# Altium PCB DSP6748_F.PcbDoc (part 13 of 16)
Units mil, origin at the board's own origin, x right, y up, seen from the top; angles counter-clockwise.
Board outline 8188.98 x 4055.12 mil, 4 copper layers (Top Layer, GND, VCC, Bottom Layer); 409 components, 262 nets, 1424 pads, 350 vias.
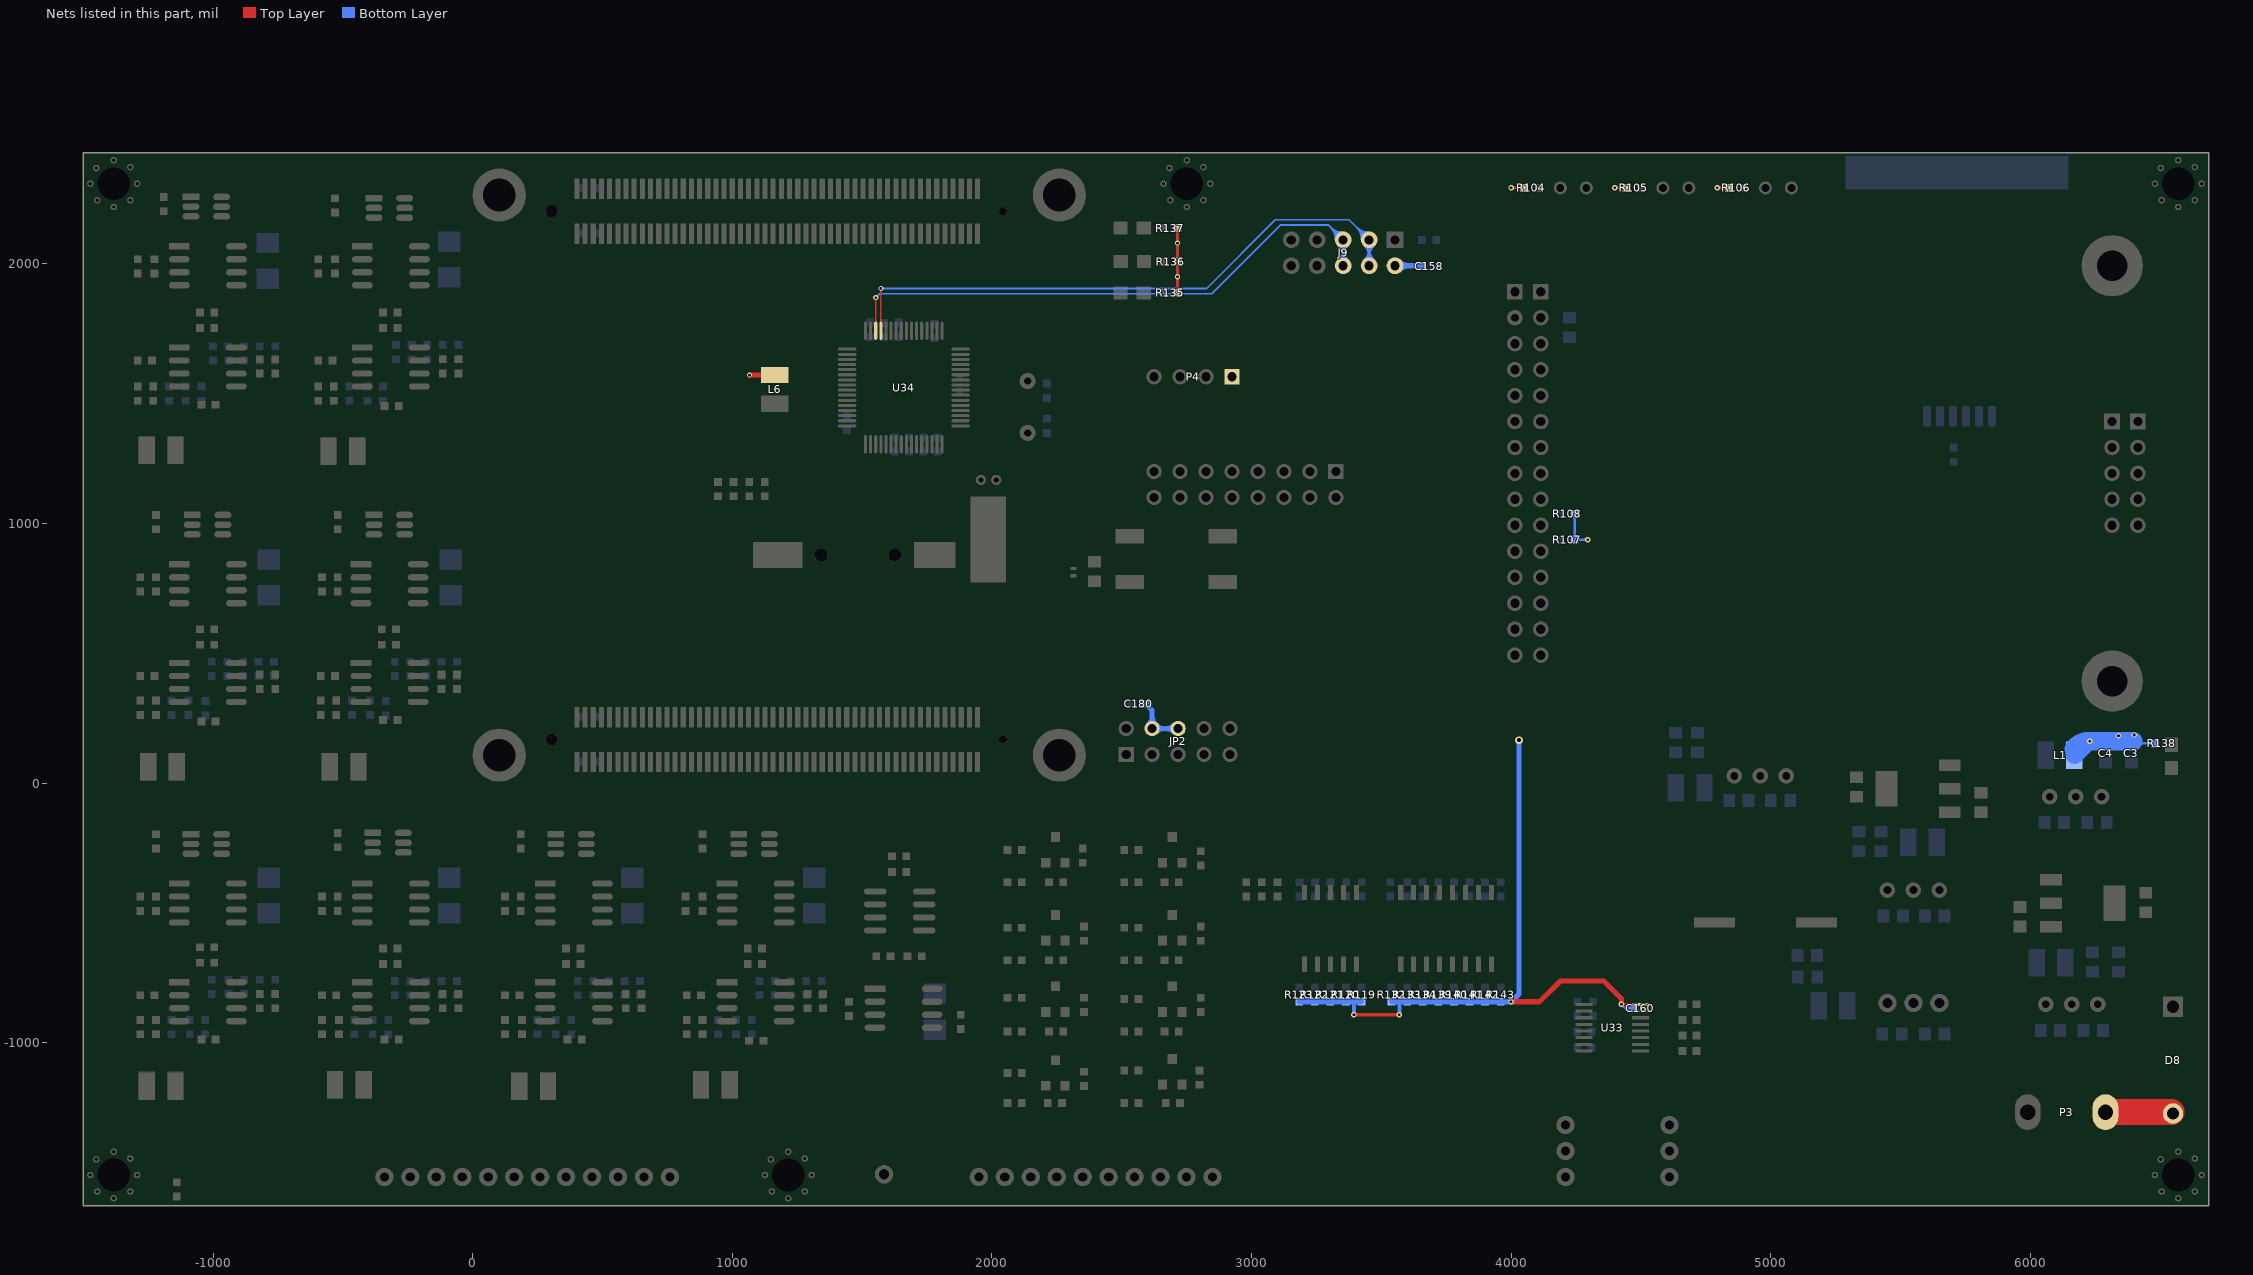
[diagram p15: the nets of this part, all layers, seen from the top]

## Via types
v1: diameter 21, hole 10, Top Layer to Bottom Layer, 244 vias
v2: diameter 20, hole 10, Top Layer to Bottom Layer, 84 vias
v3: diameter 32, hole 16, Top Layer to Bottom Layer, 11 vias
v4: diameter 24, hole 12, Top Layer to Bottom Layer, 7 vias
v5: diameter 39.37, hole 19.68, Top Layer to Bottom Layer, 3 vias
v6: diameter 30, hole 15, Top Layer to Bottom Layer, 1 vias

## Nets (pads, with @x,y where several pads share a name; then routed paths per layer and width w, separated by ;. In a path a pad name is that pad's centre, name@x,y a point inside that pad or via, vN(x,y) a via of type N, cw(c..) or ccw(c..) an arc to the next point about the centre after c; other vN are vias at no path point) (continued)
UART3_RX: J9.5 J9.6 U34.30 | length 3004.8
  Top Layer w7: v2(1552.29,1870) 1552.54,1869.75 U34.30@1552.54,1742.02
  Bottom Layer w7: v2(1552.29,1870) 1567.29,1885 2847.29,1885 3112.29,2150 3295.67,2150 J9.5@3353.15,2092.52 J9.6@3353.15,1992.52 ; v2@1552.29,1876.5 ccw(c1552.29,1892.19) 1563.39,1881.1 ccw(c1574.48,1870) v2@1558.79,1870 ; J9.5@3324.15,2092.52 ccw(c3254.14,2092.52) 3303.64,2142.03 ccw(c3353.15,2191.53) J9.5@3353.15,2121.52 ; J9.5@3331.15,2092.52 ccw(c3278.04,2092.52) 3315.59,2130.08 ccw(c3353.15,2167.63) J9.5@3353.15,2114.52 ; J9.6@3332.64,2013.03 ccw(c3283.14,2062.53) 3353.15,2062.53 ccw(c3423.16,2062.53) J9.6@3373.66,2013.03 ; J9.5@3332.64,2072.01 cw(c3283.14,2022.51) 3353.15,2022.51 cw(c3423.16,2022.51) J9.5@3373.66,2072.01 ; J9.6@3337.59,2008.08 ccw(c3300.04,2045.63) 3353.15,2045.63 ccw(c3406.26,2045.63) J9.6@3368.71,2008.08 ; J9.5@3337.59,2076.96 cw(c3300.04,2039.41) 3353.15,2039.41 cw(c3406.26,2039.41) J9.5@3368.71,2076.96 ; J9.5@3338.15,2092.52 ccw(c3301.94,2092.52) 3327.54,2118.13 ccw(c3353.15,2143.73) J9.5@3353.15,2107.52 ; J9.6@3342.54,2003.13 ccw(c3316.94,2028.73) 3353.15,2028.73 ccw(c3389.36,2028.73) J9.6@3363.76,2003.13 ; J9.5@3342.54,2081.91 cw(c3316.94,2056.31) 3353.15,2056.31 cw(c3389.36,2056.31) J9.5@3363.76,2081.91 ; J9.6@3344.65,2020.25 ccw(c3341.71,2029.85) 3351.61,2031.54 ccw(c3365.67,2033.93) J9.6@3361.54,2020.28 ; J9.6@3344.76,2020.28 ccw(c3340.63,2033.93) 3354.69,2031.54 ccw(c3364.59,2029.85) J9.6@3361.65,2020.25
UART3_TX: J9.3 J9.4 U34.29 | length 3122.4
  Top Layer w7: U34.29@1572.23,1742.02 1572.23,1845 ; v2(1572.29,1905) 1572.23,1904.94 1572.23,1845 ; 1572.65,1845.42 1572.23,1845
  Bottom Layer w7: v2(1572.29,1905) 2827.29,1905 3092.29,2170 3375.67,2170 J9.3@3453.15,2092.52 J9.4@3453.15,1992.52 ; v2@1576.89,1900.4 cw(c1587.98,1889.31) 1587.98,1905 cw(c1587.98,1920.69) v2@1576.89,1909.6 ; J9.3@3424.15,2092.52 ccw(c3354.14,2092.52) 3403.64,2142.03 ccw(c3453.15,2191.53) J9.3@3453.15,2121.52 ; J9.3@3431.15,2092.52 ccw(c3378.04,2092.52) 3415.59,2130.08 ccw(c3453.15,2167.63) J9.3@3453.15,2114.52 ; J9.4@3432.64,2013.03 ccw(c3383.14,2062.53) 3453.15,2062.53 ccw(c3523.16,2062.53) J9.4@3473.66,2013.03 ; J9.3@3432.64,2072.01 cw(c3383.14,2022.51) 3453.15,2022.51 cw(c3523.16,2022.51) J9.3@3473.66,2072.01 ; J9.4@3437.59,2008.08 ccw(c3400.04,2045.63) 3453.15,2045.63 ccw(c3506.26,2045.63) J9.4@3468.71,2008.08 ; J9.3@3437.59,2076.96 cw(c3400.04,2039.41) 3453.15,2039.41 cw(c3506.26,2039.41) J9.3@3468.71,2076.96 ; J9.3@3438.15,2092.52 ccw(c3401.94,2092.52) 3427.54,2118.13 ccw(c3453.15,2143.73) J9.3@3453.15,2107.52 ; J9.4@3442.54,2003.13 ccw(c3416.94,2028.73) 3453.15,2028.73 ccw(c3489.36,2028.73) J9.4@3463.76,2003.13 ; J9.3@3442.54,2081.91 cw(c3416.94,2056.31) 3453.15,2056.31 cw(c3489.36,2056.31) J9.3@3463.76,2081.91 ; J9.3@3444.65,2064.79 cw(c3441.71,2055.19) 3451.61,2053.5 cw(c3465.67,2051.11) J9.3@3461.54,2064.76 ; J9.3@3444.76,2064.76 cw(c3440.63,2051.11) 3454.69,2053.5 cw(c3464.59,2055.19) J9.3@3461.65,2064.79
VCC: D8.1 P3.2 | length 254.1
  Top Layer w100: P3.2@6289.81,-1267.48 D8.1@6543.9,-1267.48
VCC+3V3: C3.1 C4.1 C158.2 C160.2 C180.1 J9.2 JP2.4 JP2.6 L1.2 L6.1 P4.1 R104.1 R105.1 R106.1 R107.1 R108.1 R119.1 R120.1 R121.1 R122.1 R123.1 R132.1 R133.1 R134.1 R135.1 R136.1 R137.1 R138.1 R139.1 R140.1 R141.1 R142.1 R143.1 U33.16 | length 6376.5
  Top Layer w10: v2@2711.61,1946.46 cw(c2703.08,1937.93) 2715.15,1937.93 cw(c2727.22,1937.93) v2@2718.69,1946.46 ; v2@2711.61,1953.54 ccw(c2703.08,1962.07) 2715.15,1962.07 ccw(c2727.22,1962.07) v2@2718.69,1953.54 ; v2@2711.61,2076.46 cw(c2703.08,2067.93) 2715.15,2067.93 cw(c2727.22,2067.93) v2@2718.69,2076.46 ; v2@2711.61,2083.54 ccw(c2703.08,2092.07) 2715.15,2092.07 ccw(c2727.22,2092.07) v2@2718.69,2083.54 ; R135.1@2715.15,1887.52 R137.1@2715.15,2137.52 ; 2715.15,1981.96 cw(c2742.71,1981.96) R136.1@2723.22,2001.45 ; 2715.15,1986.79 ccw(c2694.42,1986.79) R136.1@2709.08,2001.45 ; 2715.15,2030.25 cw(c2694.42,2030.25) R136.1@2709.08,2015.59 ; 2715.15,2035.08 ccw(c2742.71,2035.08) R136.1@2723.22,2015.59 ; v1(3999.81,2292.52) R104.1@4049.81,2292.52 ; v1(4399.81,2292.52) R105.1@4444.81,2292.52 ; v1(4425.24,-852.91) U33.16@4499.06,-852.91 ; v1(4794.81,2292.52) R106.1@4839.81,2292.52 ; R135.1@2708.08,1895.59 ccw(c2691.01,1912.66) 2715.15,1912.66 ; R135.1@2708.08,1895.59 ccw(c2691.01,1912.66) 2715.15,1912.66 ; R135.1@2708.08,1895.59 ccw(c2691.01,1912.66) 2715.15,1912.66 ; R137.1@2708.08,2130.45 cw(c2691.01,2113.38) 2715.15,2113.38 ; R137.1@2708.08,2130.45 cw(c2691.01,2113.38) 2715.15,2113.38 ; R137.1@2708.08,2130.45 cw(c2691.01,2113.38) 2715.15,2113.38 ; R136.1@2709.08,2001.45 cw(c2692.01,1984.38) 2716.15,1984.38 ; R136.1@2709.08,2001.45 cw(c2692.01,1984.38) 2716.15,1984.38 ; R136.1@2709.08,2015.59 ccw(c2692.01,2032.66) 2716.15,2032.66 ; R136.1@2709.08,2015.59 ccw(c2692.01,2032.66) 2716.15,2032.66 ; 2715.15,1912.66 ccw(c2739.29,1912.66) R135.1@2722.22,1895.59 ; 2715.15,1912.66 ccw(c2739.29,1912.66) R135.1@2722.22,1895.59 ; 2715.15,1912.66 ccw(c2739.29,1912.66) R135.1@2722.22,1895.59 ; 2715.15,2113.38 cw(c2739.29,2113.38) R137.1@2722.22,2130.45 ; 2715.15,2113.38 cw(c2739.29,2113.38) R137.1@2722.22,2130.45 ; 2715.15,2113.38 cw(c2739.29,2113.38) R137.1@2722.22,2130.45 ; 2716.15,1984.38 cw(c2740.29,1984.38) R136.1@2723.22,2001.45 ; 2716.15,1984.38 cw(c2740.29,1984.38) R136.1@2723.22,2001.45 ; 2716.15,2032.66 ccw(c2740.29,2032.66) R136.1@2723.22,2015.59 ; 2716.15,2032.66 ccw(c2740.29,2032.66) R136.1@2723.22,2015.59 ; v1@4003.7,2288.63 cw(c4013.09,2279.24) 4013.09,2292.52 ; v1@4003.7,2288.63 cw(c4013.09,2279.24) 4013.09,2292.52 ; v1@4003.7,2288.63 cw(c4013.09,2279.24) 4013.09,2292.52 ; v1@4003.7,2296.41 ccw(c4013.09,2305.8) 4013.09,2292.52 ; v1@4003.7,2296.41 ccw(c4013.09,2305.8) 4013.09,2292.52 ; v1@4003.7,2296.41 ccw(c4013.09,2305.8) 4013.09,2292.52 ; 4025.67,2292.52 ccw(c4025.67,2316.66) R104.1@4042.74,2299.59 ; 4025.67,2292.52 cw(c4025.67,2268.38) R104.1@4042.74,2285.45 ; 4025.67,2292.52 cw(c4025.67,2268.38) R104.1@4042.74,2285.45 ; 4025.67,2292.52 ccw(c4025.67,2316.66) R104.1@4042.74,2299.59 ; 4025.67,2292.52 ccw(c4025.67,2316.66) R104.1@4042.74,2299.59 ; 4025.67,2292.52 cw(c4025.67,2268.38) R104.1@4042.74,2285.45 ; v1@4403.7,2288.63 cw(c4413.09,2279.24) 4413.09,2292.52 ; v1@4403.7,2288.63 cw(c4413.09,2279.24) 4413.09,2292.52 ; v1@4403.7,2288.63 cw(c4413.09,2279.24) 4413.09,2292.52 ; v1@4403.7,2296.41 ccw(c4413.09,2305.8) 4413.09,2292.52 ; v1@4403.7,2296.41 ccw(c4413.09,2305.8) 4413.09,2292.52 ; v1@4403.7,2296.41 ccw(c4413.09,2305.8) 4413.09,2292.52 ; 4420.67,2292.52 ccw(c4420.67,2316.66) R105.1@4437.74,2299.59 ; 4420.67,2292.52 ccw(c4420.67,2316.66) R105.1@4437.74,2299.59 ; 4420.67,2292.52 cw(c4420.67,2268.38) R105.1@4437.74,2285.45 ; 4420.67,2292.52 cw(c4420.67,2268.38) R105.1@4437.74,2285.45 ; 4420.67,2292.52 ccw(c4420.67,2316.66) R105.1@4437.74,2299.59 ; 4420.67,2292.52 cw(c4420.67,2268.38) R105.1@4437.74,2285.45 ; v1@4429.13,-856.8 cw(c4438.52,-866.19) 4438.52,-852.91 ; v1@4429.13,-856.8 cw(c4438.52,-866.19) 4438.52,-852.91 ; v1@4429.13,-856.8 cw(c4438.52,-866.19) 4438.52,-852.91 ; v1@4429.13,-849.02 ccw(c4438.52,-839.64) 4438.52,-852.91 ; v1@4429.13,-849.02 ccw(c4438.52,-839.64) 4438.52,-852.91 ; v1@4429.13,-849.02 ccw(c4438.52,-839.64) 4438.52,-852.91 ; v1@4798.7,2288.63 cw(c4808.09,2279.24) 4808.09,2292.52 ; v1@4798.7,2288.63 cw(c4808.09,2279.24) 4808.09,2292.52 ; v1@4798.7,2288.63 cw(c4808.09,2279.24) 4808.09,2292.52 ; v1@4798.7,2296.41 ccw(c4808.09,2305.8) 4808.09,2292.52 ; v1@4798.7,2296.41 ccw(c4808.09,2305.8) 4808.09,2292.52 ; v1@4798.7,2296.41 ccw(c4808.09,2305.8) 4808.09,2292.52 ; 4815.67,2292.52 ccw(c4815.67,2316.66) R106.1@4832.74,2299.59 ; 4815.67,2292.52 ccw(c4815.67,2316.66) R106.1@4832.74,2299.59 ; 4815.67,2292.52 cw(c4815.67,2268.38) R106.1@4832.74,2285.45 ; 4815.67,2292.52 cw(c4815.67,2268.38) R106.1@4832.74,2285.45 ; 4815.67,2292.52 ccw(c4815.67,2316.66) R106.1@4832.74,2299.59 ; 4815.67,2292.52 cw(c4815.67,2268.38) R106.1@4832.74,2285.45
  Top Layer w15: v1(3394.81,-892.48) v1(3569.81,-892.48)
  Top Layer w20: v2(1066.15,1571.52) 1164.03,1571.52 L6.1@1164.15,1571.64 ; v1(3999.81,-842.48) 4109.81,-842.48 4189.81,-762.48 4356.7,-762.48 4425.24,-831.02 v1(4425.24,-852.91)
  Bottom Layer w10: R108.1@4244.81,1037.52 R107.1@4244.81,937.52 v1(4294.81,937.52) ; v1@4425.24,-858.41 cw(c4425.24,-871.69) 4434.63,-862.3 cw(c4444.02,-852.91) v1@4430.74,-852.91 ; v1(4425.24,-852.91) 4439.81,-867.48 C160.2@4469.81,-867.48 ; C3.1@6389.81,152.52 R138.1@6479.81,152.52 ; R107.1@4237.74,944.59 ccw(c4220.67,961.66) 4244.81,961.66 ; R107.1@4237.74,944.59 ccw(c4220.67,961.66) 4244.81,961.66 ; R107.1@4237.74,944.59 ccw(c4220.67,961.66) 4244.81,961.66 ; R108.1@4237.74,1030.45 cw(c4220.67,1013.38) 4244.81,1013.38 ; R108.1@4237.74,1030.45 cw(c4220.67,1013.38) 4244.81,1013.38 ; R108.1@4237.74,1030.45 cw(c4220.67,1013.38) 4244.81,1013.38 ; 4244.81,961.66 ccw(c4268.95,961.66) R107.1@4251.88,944.59 ; 4244.81,961.66 ccw(c4268.95,961.66) R107.1@4251.88,944.59 ; 4244.81,961.66 ccw(c4268.95,961.66) R107.1@4251.88,944.59 ; 4244.81,1013.38 cw(c4268.95,1013.38) R108.1@4251.88,1030.45 ; 4244.81,1013.38 cw(c4268.95,1013.38) R108.1@4251.88,1030.45 ; 4244.81,1013.38 cw(c4268.95,1013.38) R108.1@4251.88,1030.45 ; R107.1@4251.88,930.45 cw(c4268.95,913.38) 4268.95,937.52 ; R107.1@4251.88,930.45 cw(c4268.95,913.38) 4268.95,937.52 ; R107.1@4251.88,930.45 cw(c4268.95,913.38) 4268.95,937.52 ; R107.1@4251.88,944.59 ccw(c4268.95,961.66) 4268.95,937.52 ; R107.1@4251.88,944.59 ccw(c4268.95,961.66) 4268.95,937.52 ; R107.1@4251.88,944.59 ccw(c4268.95,961.66) 4268.95,937.52 ; 4281.53,937.52 ccw(c4281.53,950.8) v1@4290.92,941.41 ; 4281.53,937.52 ccw(c4281.53,950.8) v1@4290.92,941.41 ; 4281.53,937.52 cw(c4281.53,924.24) v1@4290.92,933.63 ; 4281.53,937.52 cw(c4281.53,924.24) v1@4290.92,933.63 ; 4281.53,937.52 ccw(c4281.53,950.8) v1@4290.92,941.41 ; 4281.53,937.52 cw(c4281.53,924.24) v1@4290.92,933.63 ; 4445.67,-867.48 ccw(c4445.67,-843.34) C160.2@4462.74,-860.41 ; 4445.67,-867.48 ccw(c4445.67,-843.34) C160.2@4462.74,-860.41 ; 4445.67,-867.48 cw(c4445.67,-891.62) C160.2@4462.74,-874.55 ; 4445.67,-867.48 cw(c4445.67,-891.62) C160.2@4462.74,-874.55 ; 4445.67,-867.48 ccw(c4445.67,-843.34) C160.2@4462.74,-860.41 ; 4445.67,-867.48 cw(c4445.67,-891.62) C160.2@4462.74,-874.55 ; C3.1@6404.68,140.15 cw(c6434.56,110.27) 6434.56,152.52 ; C3.1@6404.68,140.15 cw(c6434.56,110.27) 6434.56,152.52 ; C3.1@6404.68,140.15 cw(c6434.56,110.27) 6434.56,152.52 ; C3.1@6404.68,164.89 ccw(c6434.56,194.77) 6434.56,152.52 ; C3.1@6404.68,164.89 ccw(c6434.56,194.77) 6434.56,152.52 ; C3.1@6404.68,164.89 ccw(c6434.56,194.77) 6434.56,152.52 ; 6455.67,152.52 ccw(c6455.67,176.66) R138.1@6472.74,159.59 ; 6455.67,152.52 cw(c6455.67,128.38) R138.1@6472.74,145.45 ; 6455.67,152.52 ccw(c6455.67,176.66) R138.1@6472.74,159.59 ; 6455.67,152.52 cw(c6455.67,128.38) R138.1@6472.74,145.45 ; 6455.67,152.52 ccw(c6455.67,176.66) R138.1@6472.74,159.59 ; 6455.67,152.52 cw(c6455.67,128.38) R138.1@6472.74,145.45
  Bottom Layer w15: v1(3394.81,-892.48) 3394.81,-842.48 ; v1(3569.81,-892.48) 3569.81,-842.48
  Bottom Layer w20: C180.1@2592.29,305 2617.29,280 JP2.4@2617.29,210 JP2.6@2717.29,210 ; JP2.4@2603.48,223.81 ccw(c2570.15,257.14) 2617.29,257.14 ccw(c2664.43,257.14) 2631.1,223.81 ccw(c2664.43,257.14) 2664.43,210 ccw(c2664.43,162.86) JP2.4@2631.1,196.19 ; JP2.6@2703.48,196.19 ccw(c2670.15,162.86) 2670.15,210 ccw(c2670.15,257.14) JP2.6@2703.48,223.81 ; R123.1@3183.81,-842.48 R122.1@3243.81,-842.48 R121.1@3303.81,-842.48 R120.1@3363.81,-842.48 3394.81,-842.48 R119.1@3423.81,-842.48 ; R132.1@3539.81,-842.48 3569.81,-842.48 R133.1@3599.81,-842.48 R134.1@3659.81,-842.48 R139.1@3719.81,-842.48 R140.1@3779.81,-842.48 R141.1@3839.81,-842.48 R142.1@3899.81,-842.48 v1(3999.81,-842.48) 4030,-812.29 v6(4030,165) ; J9.2@3553.15,1992.52 C158.2@3656.15,1992.52 ; J9.2@3569.06,1976.61 cw(c3607.47,1938.2) 3607.47,1992.52 cw(c3607.47,2046.84) J9.2@3569.06,2008.43
  Bottom Layer w70: L1.2@6167.02,131.14 cw(c6223.55,92.89) v1@6223.55,161.14 ; L1.2@6167.45,131.65 cw(c6238.64,60.47) v1@6238.64,161.14 ; L1.2@6169.93,107.52 v1@6223.55,161.14 ; L1.2@6169.93,125.67 ccw(c6169.93,169.49) L1.2@6200.91,138.5 ; C3.1@6398.16,161.14 v1@6223.55,161.14
  other v1: 6229.81,161.14 6339.81,182.52 6399.81,185.02
  other v2: 2715.15,1950 2715.15,2080